# EAGLE board TinkerCad (EAGLE 9.7.0)

Size 79.28 x 29.66 mm. Coordinates in mm from the lower left corner, seen from the top.
Outline: 0,0 79.28,0 79.28,29.66 0,29.66 0,0
Copper layers (1*16): Top 0.035mm / dielectric 1.5mm / Bottom 0.035mm
Design rules "default": minimum track width 6mil, minimum drill 0.35mm, track to track 6mil, track to pad 6mil, pad to pad 6mil, via to via 6mil, smd to smd 6mil, copper to edge 40mil, drill to drill 6mil, minimum pad ring 10mil, minimum via ring 8mil, stop-mask expansion 4mil, vias tented up to drill 0mil, thermal gap 10mil

## Footprints (pad centres in the part's own frame; a part is rotated, then mirrored left to right if it is on the bottom)
BATTERY-GENERIC = drill 1.118 pad 3.15 octagon: + 2.54,0; - -2.54,0
LEDRD254W60D565H860B = drill 0.981 pad 1.581: 1 -1.27,0; 2 1.27,0
RESAD1016W63L850D250B = drill 0.83 pad 1.43: 1 -5.08,0; 2 5.08,0

## Placement (x,y rotation side)
BAT2  6V  [BATTERY-GENERIC]  8.26,10.67 90 top
D1  RED  [LEDRD254W60D565H860B]  71.23,6.06 270 top
R1  1k  [RESAD1016W63L850D250B]  42.28,23.33 0 top

## Library data of the parts
BAT2 R1 = Tinkercad
D1 = Tinkercad; CATEGORY: Opto-Electronic; SUB-CATEGORY: LED; VALUE: LED_RED

## Nets
BAT2+: BAT2.+ R1.1
BAT2-: BAT2.- D1.2
D1_A: D1.1 R1.2

## Tracks (layer width: path | path; a pad name or v marks a point on that pad's centre or on a via)
BAT2+  (1 unrouted)
BAT2-  (1 unrouted)
D1_A  (1 unrouted)